# EAGLE board Hera v2 (EAGLE 7.2.0)
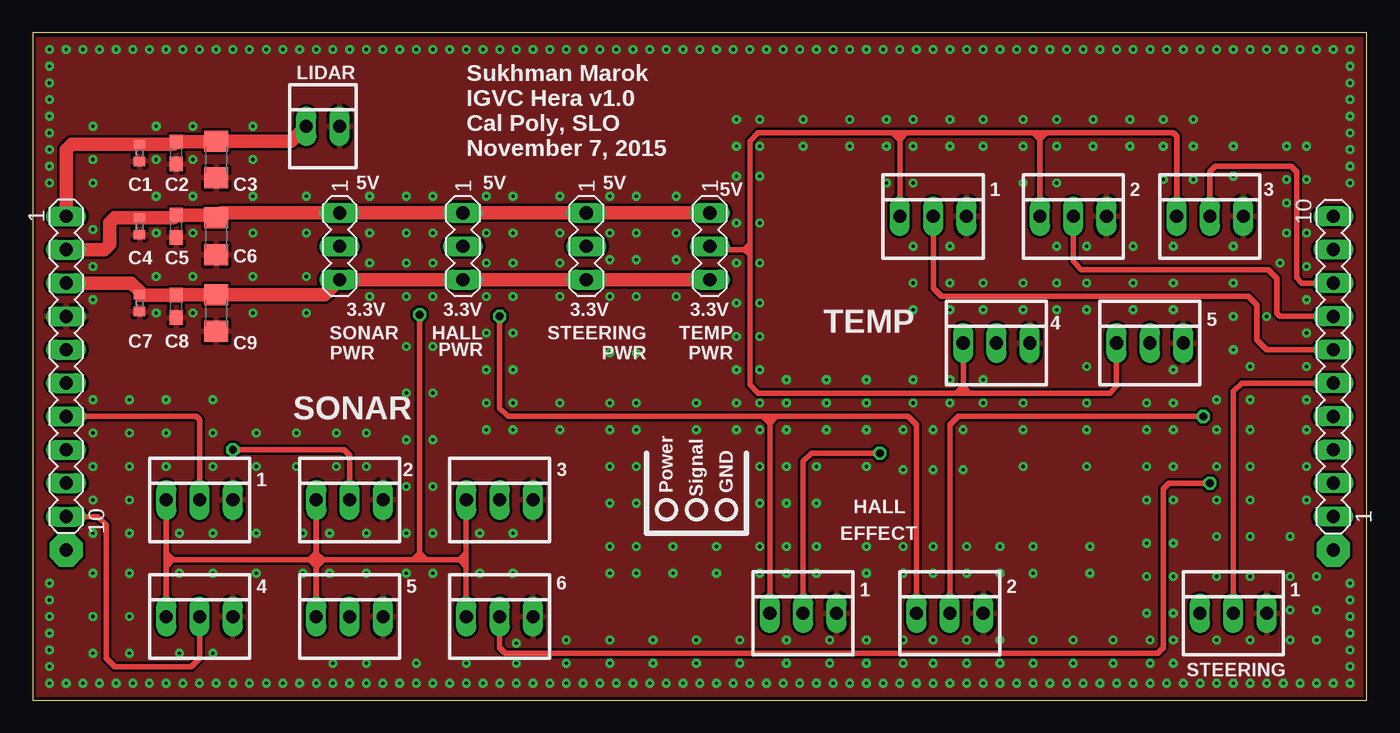
[diagram p0: board, top side]
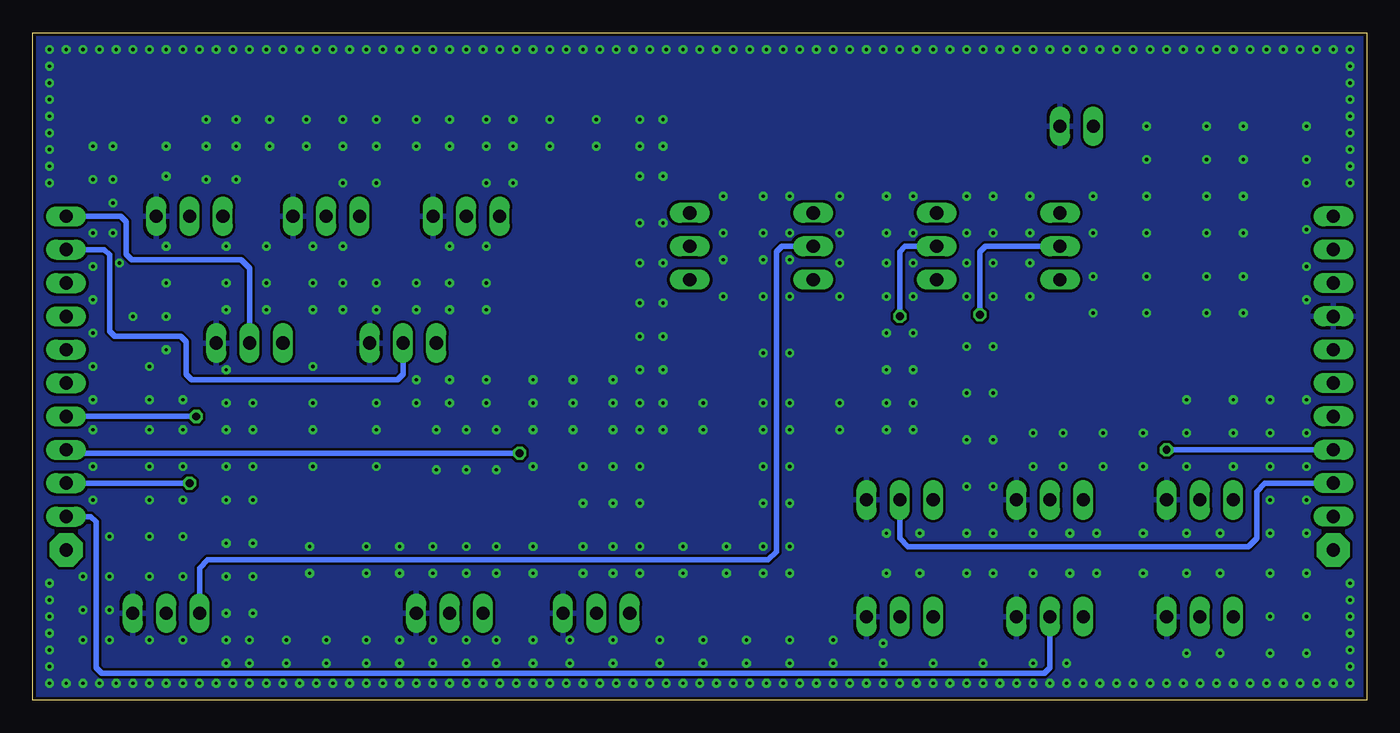
[diagram p1: board, bottom side, seen from below]

Size 101.6 x 50.8 mm. Coordinates in mm from the lower left corner, seen from the top.
Outline: 0,0 101.6,0 101.6,50.8 0,50.8 0,0
Copper layers (1*16): Top 0.035mm / dielectric 1.5mm / Bottom 0.035mm
Design rules "default *": minimum track width 10mil, minimum drill 10mil, track to track 8mil, track to pad 8mil, pad to pad 8mil, via to via 8mil, smd to smd 8mil, copper to edge 10mil, drill to drill 8mil, minimum pad ring 10mil, minimum via ring 8mil, stop-mask expansion 4mil, vias tented up to drill 0mil, thermal gap 10mil

## Footprints (pad centres in the part's own frame; a part is rotated, then mirrored left to right if it is on the bottom)
C0402 = smd 0.7 x 0.9: 1 -0.65,0; 2 0.65,0
C0603 = smd 1.1 x 1: 1 -0.85,0; 2 0.85,0
C1206 = smd 1.6 x 1.8: 1 -1.4,0; 2 1.4,0
MA10-1 = drill 1.016 long: 1 -11.43,0; 2 -8.89,0; 3 -6.35,0; 4 -3.81,0; 5 -1.27,0; 6 1.27,0; 7 3.81,0; 8 6.35,0; 9 8.89,0; 10 11.43,0
MA03-1 = drill 1.016 long: 1 -2.54,0; 2 0,0; 3 2.54,0
22-23-2031 = drill 1 long: 1 -2.54,0; 2 0,0; 3 2.54,0
22-23-2021 = drill 1 long: 1 -1.27,0; 2 1.27,0

## Placement (x,y rotation side)
C1  .1µF  [C0402]  8.13,41.66 270 top
C2  1µF  [C0603]  10.92,41.66 270 top
C3  10µF  [C1206]  13.97,41.15 270 top
C4  .1µF  [C0402]  8.13,36.07 270 top
C5  1µF  [C0603]  10.92,36.07 270 top
C6  10µF  [C1206]  13.97,35.31 270 top
C7  .1µF  [C0402]  8.13,30.23 270 top
C8  1µF  [C0603]  10.92,29.97 270 top
C9  10µF  [C1206]  13.97,29.46 270 top
SV1  [MA10-1]  2.54,25.4 270 top
SV2  [MA10-1]  99.06,25.4 90 top
SV3  [MA03-1]  51.56,34.54 270 top
SV4  [MA03-1]  23.37,34.54 270 top
SV5  [MA03-1]  32.77,34.54 270 top
SV6  [MA03-1]  42.16,34.54 270 top
X1  22-23-2031  [22-23-2031]  12.7,15.24 0 top
X2  22-23-2031  [22-23-2031]  24.13,15.24 0 top
X3  22-23-2031  [22-23-2031]  35.56,15.24 0 top
X4  22-23-2031  [22-23-2031]  12.7,6.35 0 top
X5  22-23-2031  [22-23-2031]  24.13,6.35 0 top
X6  22-23-2031  [22-23-2031]  35.56,6.35 0 top
X7  22-23-2031  [22-23-2031]  58.67,6.6 0 top
X8  22-23-2031  [22-23-2031]  69.85,6.6 0 top
X9  22-23-2031  [22-23-2031]  91.44,6.6 0 top
X11  22-23-2031  [22-23-2031]  68.58,36.83 0 top
X12  22-23-2031  [22-23-2031]  79.25,36.83 0 top
X13  22-23-2031  [22-23-2031]  89.66,36.83 0 top
X14  22-23-2031  [22-23-2031]  73.41,27.18 0 top
X15  22-23-2031  [22-23-2031]  85.09,27.18 0 top
X16  22-23-2021  [22-23-2021]  22.1,43.69 0 top

## Library data of the parts
C1 C4 C7 = rcl; DIGI: 490-5920-1-ND
C2 C5 C8 = rcl; DIGI: 490-3897-1-ND
C3 C6 C9 = rcl; DIGI: 490-5525-1-ND
SV1-SV6 = con-lstb; OC_FARNELL: unknown; OC_NEWARK: unknown
X1-X9 X11-X15 = con-molex; MF: MOLEX; MPN: 22-23-2031; OC_FARNELL: 1462950; OC_NEWARK: 30C0862
X16 = con-molex; MF: MOLEX; MPN: 22-23-2021; OC_FARNELL: 1462926; OC_NEWARK: 25C3832

## Nets
GND: C1.2 C2.2 C3.2 C4.2 C5.2 C6.2 C7.2 C8.2 C9.2 SV1.4 X1.3 X2.3 X3.3 X4.3 X5.3 X6.3 X7.3 X8.3 X9.3 X11.3 X12.3 X13.3 X14.3 X15.3 X16.2
HALL_EFFECT_DATA_1: SV2.3 X7.2
HALL_EFFECT_DATA_2: SV2.4 X8.2
I2C_SCL: SV1.6
I2C_SDA: SV1.5
PP3V3: C7.1 C8.1 C9.1 SV1.3 SV3.3 SV4.3 SV5.3 SV6.3
PP5V: C4.1 C5.1 C6.1 SV1.2 SV3.1 SV4.1 SV5.1 SV6.1
PP12V: C1.1 C2.1 C3.1 SV1.1 X16.1
PPHALLEFFECT: SV5.2 X7.1 X8.1
PPSONAR: SV4.2 X1.1 X2.1 X3.1 X4.1 X5.1 X6.1
PPSTEERING: SV6.2 X9.1
PPTEMP: SV3.2 X11.1 X12.1 X13.1 X14.1 X15.1
SONAR_DATA_1: SV1.7 X1.2
SONAR_DATA_2: SV1.8 X2.2
SONAR_DATA_3: SV1.9 X3.2
SONAR_DATA_4: SV1.10 X4.2
SONAR_DATA_5: SV2.1 X5.2
SONAR_DATA_6: SV2.2 X6.2
STEERING_ENCODER_DATA: SV2.5 X9.2
TEMP_1_DATA: SV2.6 X11.2
TEMP_2_DATA: SV2.7 X12.2
TEMP_3_DATA: SV2.8 X13.2
TEMP_4_DATA: SV2.9 X14.2
TEMP_5_DATA: SV2.10 X15.2

## Tracks (layer width: path | path; a pad name or v marks a point on that pad's centre or on a via)
GND  (via drill 0.25)
  other vias: 1.27,8.89 1.27,7.62 1.27,6.35 1.27,5.08 1.27,3.81 1.27,2.54 1.27,1.27 2.54,1.27 3.81,1.27 5.08,1.27 6.35,1.27 7.62,1.27 8.89,1.27 10.16,1.27 11.43,1.27 12.7,1.27 13.97,1.27 15.24,1.27 16.51,1.27 17.78,1.27 19.05,1.27 20.32,1.27 21.59,1.27 22.86,1.27 24.13,1.27 25.4,1.27 26.67,1.27 27.94,1.27 29.21,1.27 30.48,1.27 31.75,1.27 33.02,1.27 34.29,1.27 35.56,1.27 36.83,1.27 38.1,1.27 39.37,1.27 40.64,1.27 41.91,1.27 43.18,1.27 44.45,1.27 45.72,1.27 46.99,1.27 48.26,1.27 49.53,1.27 50.8,1.27 52.07,1.27 53.34,1.27 54.61,1.27 55.88,1.27 57.15,1.27 58.42,1.27 59.69,1.27 60.96,1.27 62.23,1.27 63.5,1.27 64.77,1.27 66.04,1.27 67.31,1.27 68.58,1.27 69.85,1.27 71.12,1.27 72.39,1.27 73.66,1.27 74.93,1.27 76.2,1.27 78.74,1.27 77.47,1.27 80.01,1.27 81.28,1.27 82.55,1.27 83.82,1.27 85.09,1.27 86.36,1.27 87.63,1.27 88.9,1.27 90.17,1.27 91.44,1.27 92.71,1.27 93.98,1.27 95.25,1.27 97.79,1.27 96.52,1.27 99.06,1.27 100.33,1.27 100.33,2.54 100.33,3.81 100.33,5.08 100.33,6.35 100.33,7.62 100.33,8.89 100.33,39.37 100.33,40.64 100.33,41.91 100.33,43.18 100.33,44.45 100.33,45.72 100.33,46.99 100.33,48.26 100.33,49.53 99.06,49.53 97.79,49.53 95.25,49.53 96.52,49.53 93.98,49.53 92.71,49.53 91.44,49.53 90.17,49.53 88.9,49.53 87.63,49.53 86.36,49.53 85.09,49.53 83.82,49.53 82.55,49.53 81.28,49.53 80.01,49.53 78.74,49.53 77.47,49.53 76.2,49.53 74.93,49.53 73.66,49.53 72.39,49.53 71.12,49.53 69.85,49.53 68.58,49.53 67.31,49.53 66.04,49.53 64.77,49.53 63.5,49.53 62.23,49.53 60.96,49.53 59.69,49.53 58.42,49.53 57.15,49.53 55.88,49.53 54.61,49.53 53.34,49.53 52.07,49.53 50.8,49.53 49.53,49.53 46.99,49.53 48.26,49.53 45.72,49.53 43.18,49.53 44.45,49.53 41.91,49.53 40.64,49.53 39.37,49.53 38.1,49.53 36.83,49.53 35.56,49.53 34.29,49.53 33.02,49.53 31.75,49.53 30.48,49.53 29.21,49.53 27.94,49.53 26.67,49.53 25.4,49.53 24.13,49.53 22.86,49.53 21.59,49.53 20.32,49.53 17.78,49.53 19.05,49.53 16.51,49.53 15.24,49.53 13.97,49.53 11.43,49.53 12.7,49.53 10.16,49.53 8.89,49.53 6.35,49.53 7.62,49.53 5.08,49.53 1.27,49.53 1.27,48.26 1.27,46.99 3.81,49.53 2.54,49.53 1.27,45.72 1.27,44.45 1.27,43.18 1.27,41.91 1.27,40.64 1.27,39.37 75.44,44.2 75.44,42.16 77.98,42.16 77.98,44.2 86.11,44.2 86.11,42.16 83.57,42.16 80.77,42.16 80.77,44.2 83.57,44.2 65.02,42.16 65.02,44.2 58.67,44.2 62.23,44.2 58.67,42.16 62.23,42.16 53.59,39.88 53.59,36.32 53.59,33.27 53.59,30.23 53.59,27.69 53.59,25.15 57.4,24.38 57.4,22.61 57.4,20.57 60.45,24.38 60.45,22.61 60.45,20.57 63.5,22.61 63.5,24.38 63.5,20.57 67.06,24.38 67.06,22.61 66.29,20.57 68.58,20.57 66.29,17.53 68.58,17.53 70.87,17.53 72.39,24.38 72.39,22.61 75.44,22.61 91.44,26.67 91.44,31.75 91.44,29.21 91.44,34.54 86.87,31.75 86.87,34.54 86.87,29.72 65.02,39.37 77.98,39.37 86.11,39.62 88.39,39.62 95.5,39.62 91.44,39.88 95.5,35.56 97.03,39.62 95,33.27 97.03,33.02 97.03,30.48 97.03,27.94 97.03,25.4 97.03,22.86 90.17,15.24 90.17,12.45 92.71,12.45 84.84,15.24 84.84,11.94 84.84,9.4 84.84,6.6 85.09,4.57 85.09,2.79 82.3,4.57 82.3,2.79 79.25,2.79 79.25,4.57 76.2,4.57 76.2,2.79 73.66,2.79 73.66,4.57 71.12,4.57 71.12,2.79 68.58,4.57 68.58,2.79 57.4,4.57 57.4,2.79 60.71,4.57 60.71,2.79 53.85,4.57 53.85,2.79 50.55,2.79 50.55,4.57 47.24,4.57 47.24,2.79 43.94,2.79 43.94,4.57 40.64,4.57 40.64,2.79 36.83,4.32 36.83,2.79 33.02,2.79 29.21,2.79 25.4,2.79 22.86,2.79 11.18,3.56 13.72,3.56 4.57,6.35 4.57,3.56 4.57,15.24 4.57,17.78 4.57,20.32 4.57,22.86 7.37,20.32 7.37,22.86 10.16,22.86 10.16,20.32 13.72,22.86 13.72,20.32 10.16,17.78 7.37,17.78 13.72,17.78 17.02,20.32 17.02,17.78 20.07,17.78 20.07,20.32 23.11,20.32 23.11,17.78 25.4,17.78 22.61,12.7 20.57,12.7 20.57,9.65 11.18,9.65 11.18,12.7 25.4,12.7 25.4,9.65 34.04,12.7 36.58,12.7 7.37,15.24 28.45,12.7 28.45,16.26 28.45,19.81 28.45,23.37 28.45,26.92 30.48,12.7 30.48,16.26 30.48,19.81 30.48,23.37 30.48,26.92 28.45,30.73 30.48,30.73 30.48,33.27 28.45,33.27 28.45,35.56 25.65,35.56 25.65,38.35 28.45,38.35 34.54,33.27 36.58,33.27 43.94,30.73 43.94,33.53 49.02,33.53 49.02,30.73 34.54,30.73 36.58,30.73 34.54,27.94 36.58,27.94 36.58,25.15 34.54,25.15 34.54,22.61 36.58,22.61 36.58,20.57 40.13,22.61 43.94,22.61 40.13,20.57 43.94,20.57 45.97,20.57 45.97,22.61 43.94,17.78 45.97,17.78 43.94,14.99 45.97,14.99 45.97,11.68 43.94,11.68 45.97,9.65 48.77,11.68 48.77,9.65 52.07,11.68 52.07,9.65 59.69,11.68 59.69,9.65 66.29,11.68 68.58,11.68 66.29,9.65 68.58,9.65 71.12,11.68 71.12,9.65 80.52,11.68 80.52,9.65 57.4,11.68 57.4,9.65 57.4,14.99 59.69,14.99 59.69,17.78 57.4,17.78 50.55,20.57 50.55,22.61 90.17,22.86 92.71,22.86 92.71,15.24 70.87,20.57 75.44,20.57 90.17,20.57 75.44,17.78 90.17,17.78 20.83,32.26 20.83,29.46 12.19,29.46 12.19,32.26 9.4,29.46 9.4,32.26 4.57,30.48 4.57,33.02 4.57,35.81 9.4,35.56 16.76,35.56 16.76,38.35 20.83,38.35 20.83,35.56 9.4,41.15 12.19,43.69 12.19,41.15 40.13,33.27 40.13,30.73 69.85,24.38 69.85,22.61 43.94,26.42 95.76,6.86 97.79,6.86 90.17,9.4 92.71,9.4 95.76,9.4 97.79,9.4 95.76,12.45 92.71,20.57 92.71,17.78 97.03,20.57 97.03,17.78 97.03,15.24 49.02,35.56 49.02,38.35 43.94,35.56 43.94,38.35 4.57,9.65 7.37,12.7 7.37,9.65 25.65,33.27 16.76,32.26 16.76,29.46 9.4,43.69 4.57,43.69 4.57,41.15 4.57,39.37 9.4,38.35 12.19,35.56 12.19,38.35 16.76,41.15 16.76,43.69 30.48,35.56 30.48,38.35 4.57,12.7 30.48,9.65 22.61,9.65 83.82,34.54 77.98,34.54 83.82,31.75 83.82,29.72 34.04,9.65 69.85,34.54 67.06,34.54 34.54,35.56 34.54,38.35 40.13,35.56 40.13,38.35 45.97,26.42 45.97,30.73 45.97,33.53 45.97,35.56 45.97,38.35 28.45,9.65 84.84,17.78 84.84,20.57 84.84,22.61 80.26,17.78 80.26,20.57 80.26,22.61 80.26,25.4 80.26,29.72 80.26,31.75 80.26,34.54 77.98,31.75 77.98,29.72 72.39,29.72 75.44,29.72 75.44,31.75 72.39,31.75 69.85,29.72 69.85,31.75 67.06,31.75 67.06,39.37 67.06,42.16 67.06,44.2 69.85,42.16 69.85,44.2 72.39,44.2 72.39,42.16 86.87,25.15 86.87,22.61 86.87,20.57 86.87,17.78 86.87,15.24 86.87,11.94 86.87,9.4 86.87,6.6 86.87,4.57 86.87,2.79 75.44,39.37 36.58,35.56 36.58,38.35 17.02,12.7 17.02,9.65 7.37,6.35 7.37,3.56 25.65,30.73 53.59,44.2 53.59,42.16 53.59,22.61 88.39,42.16 88.39,44.2 91.44,42.16 95.5,42.16 97.03,42.16 95.5,37.85 97.03,35.56 90.17,4.57 92.71,4.57 95.76,4.57 97.79,4.57 43.94,9.65 93.98,29.21 92.71,25.4 53.59,20.57 55.37,20.57 55.37,25.15 55.37,22.61 55.37,17.78 55.37,14.99 55.37,11.68 55.37,9.65 55.37,27.69 55.37,30.23 55.37,33.27 55.37,36.32 55.37,39.88 55.37,42.16 55.37,44.2 25.4,20.32 13.72,9.65 13.72,12.7 76.2,9.65 76.2,11.68 73.66,9.65 73.66,11.68 66.29,2.79 63.5,17.78 63.5,11.68 63.5,9.65 63.5,4.57 63.5,2.79 66.29,4.57 34.54,20.57 36.58,9.65 67.06,29.72
  pour Bottom: 0.25,50.55 0.25,0.25 8.64,0.25 101.35,0.25 101.35,5.33 101.35,50.55 100.08,50.55
  pour Top: 0.25,50.29 0.25,0 8.64,0 101.35,0 101.35,5.08 101.35,50.29 100.08,50.29
HALL_EFFECT_DATA_1  (via drill 0.6)
  Top 0.406: X7.2 58.67,18.16 59.31,18.8 v64.52,18.8
  Bottom 0.406: v64.52,18.8 98.81,18.8 arc90 SV2.3
HALL_EFFECT_DATA_2  (via drill 0.6)
  Top 0.406: X8.2 69.85,20.95 70.48,21.59 v89.15,21.59
  Bottom 0.406: v89.15,21.59 SV2.4
N$1  (via drill 1.02 pad 2.54)
  other vias: 2.54,11.43
N$2  (via drill 1.02 pad 2.54)
  other vias: 99.06,11.43
PP3V3
  Top 0.406: 10.96,30.86 C8.1 | 8.18,30.82 C7.1 8.13,31.11
  Top 1.016: 10.96,30.86 C9.1 22.23,30.86 SV4.3 SV5.3 SV6.3 SV3.3 | C8.1 8.18,30.82 | 8.13,31.11 7.49,31.75 SV1.3
PP5V
  Top 0.406: 13.76,36.92 C6.1 14.35,37.08 | C5.1 10.72,36.72
  Top 1.016: 13.76,36.92 C5.1 | 10.72,36.72 C4.1 6.24,36.72 5.84,36.32 5.84,34.7 5.44,34.29 SV1.2 | SV3.1 SV6.1 SV5.1 SV4.1 14.35,37.08
PP12V
  Top 0.406: C3.1 13.93,42.51 | C2.1 10.72,42.31
  Top 1.016: 13.93,42.51 C2.1 | 10.72,42.31 C1.1 2.95,42.31 2.54,41.9 SV1.1 | C3.1 19.69,42.55 X16.1
PPHALLEFFECT  (via drill 0.6)
  Top 0.406: 55.63,21.59 36.2,21.59 35.56,22.23 v35.56,29.21 | 55.63,21.59 56.13,21.59 | 56.13,21.59 56.64,21.59 | 56.64,21.59 66.67,21.59 67.31,20.95 X8.1 | 55.63,21.59 56.13,21.08 56.64,21.59 | X7.1 56.13,21.59
  Bottom 0.406: SV5.2 35.15,34.54 35.56,34.14 v35.56,29.21
PPSONAR  (via drill 0.6)
  Top 0.406: X2.1 21.59,11.18 | 21.59,11.18 21.59,10.67 | 21.59,10.67 21.59,10.16 | 21.59,10.16 X5.1 | X3.1 33.02,11.18 | 33.02,11.18 33.02,10.67 | 33.02,10.67 33.02,10.16 | 33.02,10.16 X6.1 | X1.1 10.16,11.18 | 10.16,11.18 10.67,10.67 | 10.16,10.16 10.67,10.67 | X4.1 10.16,11.18 | 10.67,10.67 21.08,10.67 | 21.08,10.67 21.59,10.67 | 21.59,10.67 22.1,10.67 | 21.08,10.67 21.59,11.18 | 21.08,10.67 21.59,10.16 | 21.59,10.16 22.1,10.67 | 21.59,11.18 22.1,10.67 | 33.02,10.16 32.51,10.67 33.02,11.18 | 28.96,10.67 29.08,10.79 | 29.08,10.79 29.21,10.92 | 22.1,10.67 28.96,10.67 | 29.97,10.67 29.59,11.05 | 29.59,11.05 29.46,11.18 | 29.21,10.67 29.08,10.79 | 29.21,10.92 29.46,10.67 29.59,10.79 29.59,11.05 | 33.02,10.67 28.96,10.67 | 29.46,11.18 29.21,10.92 | 29.21,10.92 arc90 29.46,11.18 | 29.46,11.18 v29.46,29.34
  Bottom 0.406: SV4.2 29.06,34.54 29.46,34.14 v29.46,29.34
PPSTEERING
  Bottom 0.406: X9.1 88.9,10.03 88.27,10.67 45.59,10.67 44.96,11.3 44.96,34.14 44.55,34.54 SV6.2
PPTEMP
  Top 0.406: X15.1 82.55,23.88 82.04,23.37 71.37,23.37 | 71.37,23.37 70.87,23.37 | 70.87,23.37 70.36,23.37 | 70.36,23.37 70.87,23.88 71.37,23.37 | X14.1 70.87,23.37 | 70.36,23.37 55.24,23.37 54.61,24 54.61,34.7 | X13.1 87.12,42.93 86.87,43.18 77.22,43.18 | 77.22,43.18 76.71,43.18 | 76.71,43.18 76.2,43.18 | 76.2,43.18 66.55,43.18 | 66.55,43.18 66.04,43.18 | 66.04,43.18 65.53,43.18 | 65.53,43.18 55.24,43.18 54.61,42.55 54.61,34.8 54.61,34.7 | 77.22,43.18 76.71,42.67 76.2,43.18 | X12.1 76.71,43.18 | 66.55,43.18 66.04,42.67 65.53,43.18 | X11.1 66.04,43.18 | 54.36,34.29 54.2,34.29 | 54.2,34.29 51.82,34.29 SV3.2 | 54.61,34.7 54.2,34.29 | 54.61,33.88 54.2,34.29
SONAR_DATA_1
  Top 0.406: X1.2 12.7,21.34 12.45,21.59 SV1.7
SONAR_DATA_2  (via drill 0.6)
  Top 0.406: X2.2 24.13,18.64 23.72,19.05 v15.24,19.05
  Bottom 0.406: v15.24,19.05 SV1.8
SONAR_DATA_3
  Bottom 0.406: X3.2 35.56,12.32 34.92,11.68 9.02,11.68 8.38,12.32 8.38,15.88 7.75,16.51 SV1.9
SONAR_DATA_4
  Top 0.406: X4.2 12.7,3.17 12.06,2.54 6.22,2.54 5.59,3.17 5.59,13.34 4.95,13.97 SV1.10
SONAR_DATA_5
  Bottom 0.406: X5.2 24.13,2.44 24.54,2.03 96.37,2.03 96.77,2.44 96.77,13.56 97.18,13.97 SV2.1
SONAR_DATA_6  (via drill 0.6)
  Top 0.406: X6.2 35.56,3.96 35.97,3.56 85.7,3.56 86.11,3.96 86.11,16.1 86.51,16.51 87.78,16.51 88.39,16.51 v89.66,16.51
  Bottom 0.406: v89.66,16.51 SV2.2
STEERING_ENCODER_DATA
  Top 0.406: X9.2 91.44,23.5 92.08,24.13 SV2.5
TEMP_1_DATA
  Top 0.406: X11.2 68.58,31.37 69.22,30.73 92.58,30.73 93.22,30.1 93.22,27.43 93.98,26.67 SV2.6
TEMP_2_DATA
  Top 0.406: X12.2 79.25,33.4 79.88,32.77 94.11,32.77 94.74,32.13 94.74,29.46 95,29.21 SV2.7
TEMP_3_DATA
  Top 0.406: SV2.8 96.67,31.75 96.27,32.16 96.27,40.23 95.86,40.64 90.07,40.64 89.66,40.23 X13.2
TEMP_4_DATA
  Bottom 0.406: SV2.9 96.16,34.29 95.76,33.88 95.76,28.09 95.35,27.69 90.32,27.69 89.92,27.28 89.92,24.79 89.51,24.38 73.81,24.38 73.41,24.79 X14.2
TEMP_5_DATA
  Bottom 0.406: X15.2 85.09,32.89 85.72,33.53 94.08,33.53 94.49,33.93 94.49,36.42 94.89,36.83 SV2.10

## Text on the board
tPlace: LIDAR | Sukhman Marok / IGVC Hera v1.0 / Cal Poly, SLO / November 7, 2015 | 5V | 5V | 5V | 5V | 1 | 2 | 3 | 3.3V | 3.3V | 3.3V | 3.3V | HALL | STEERING / PWR | TEMP / PWR | TEMP | 4 | 5 | PWR | SONAR / PWR | SONAR | 2 | 3 | 1 | Power | GND | Signal | HALL | EFFECT | 4 | 5 | 6 | 1 | 2 | 1 | STEERING